# Altium PCB LED Board - Placement v1.0 20210410.PcbDoc
Units mil, origin at the board's own origin, x right, y up, seen from the top; angles counter-clockwise.
Board outline 2362.2 x 2858.27 mil, 2 copper layers (Top Layer, Bottom Layer), stack 65.792 mil thick; 54 components, 96 nets, 276 pads, 119 vias.
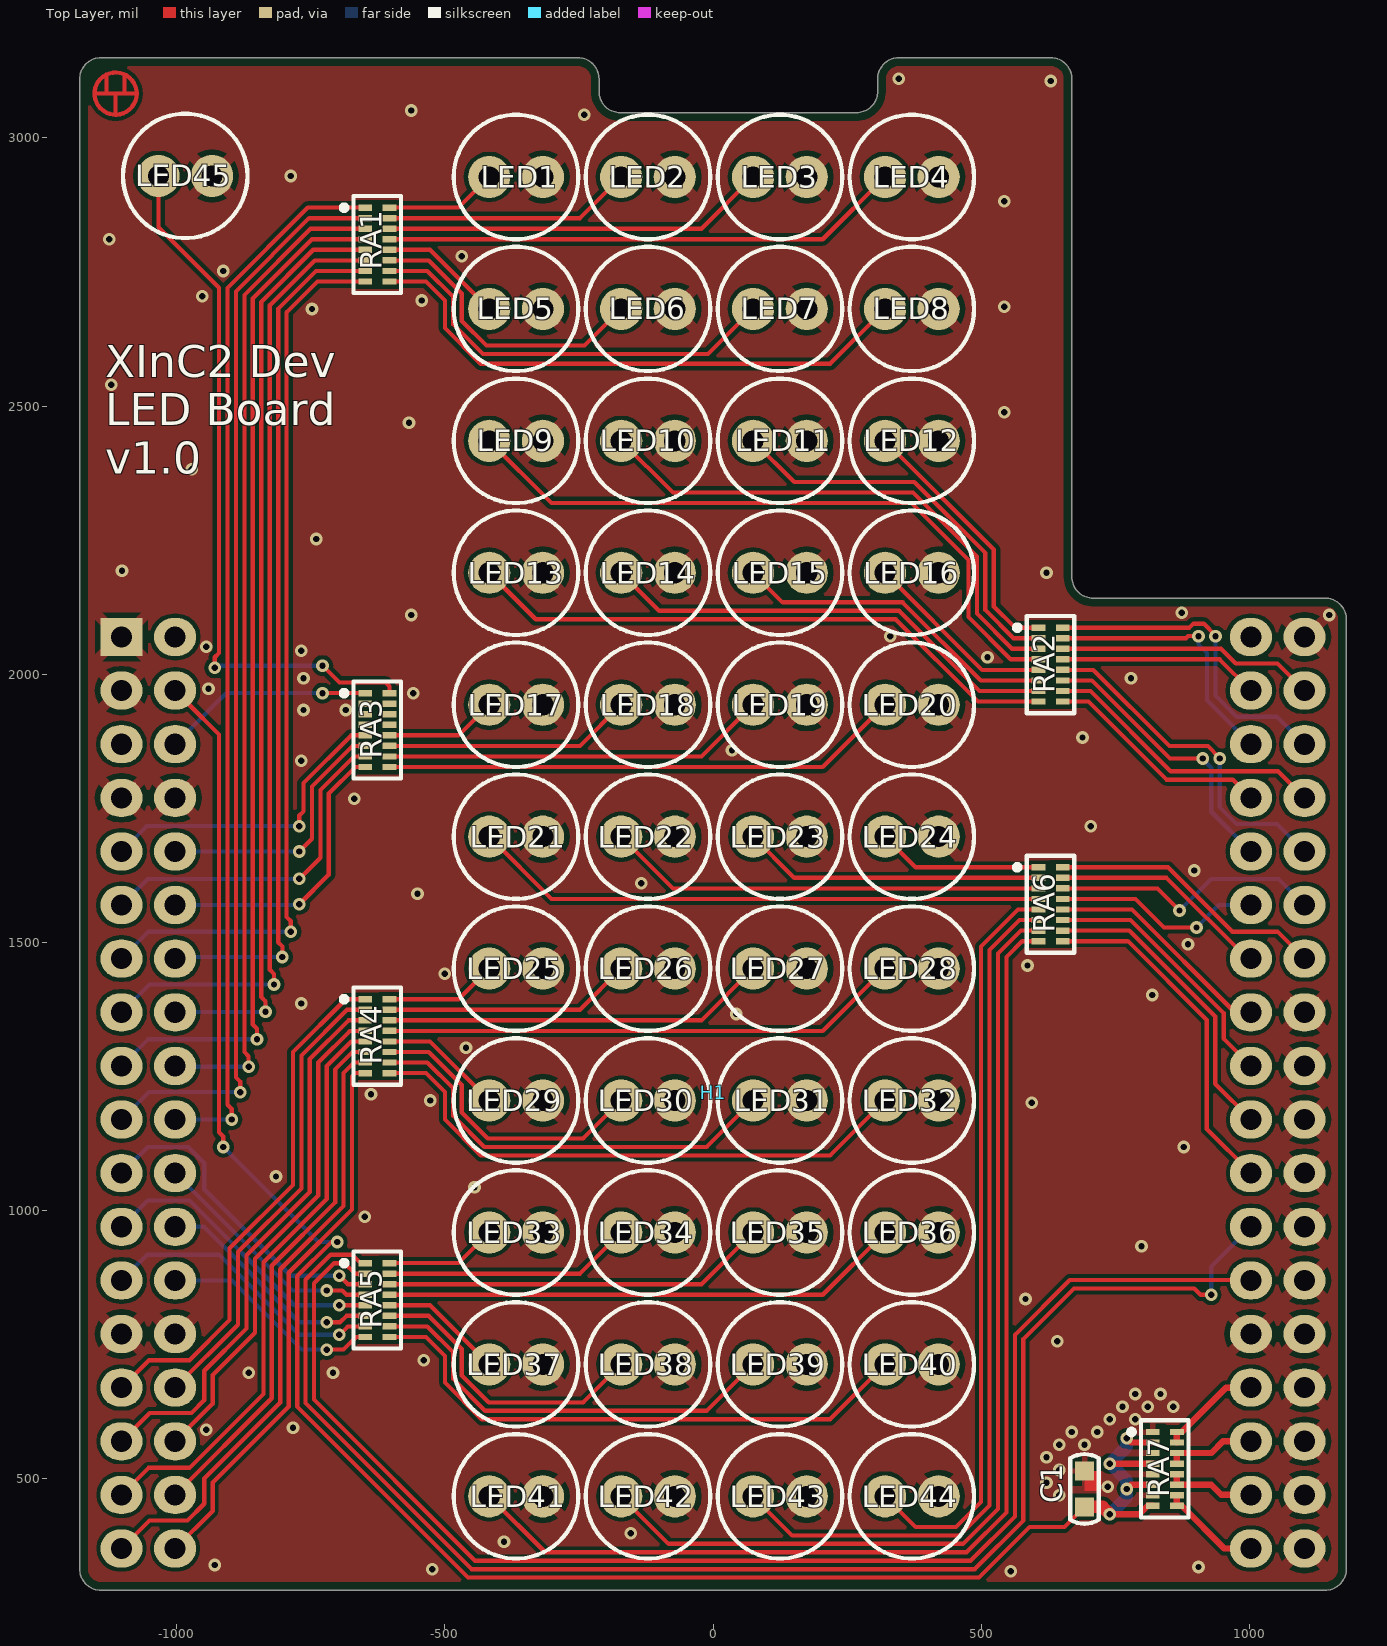
[diagram p0: Top Layer view]
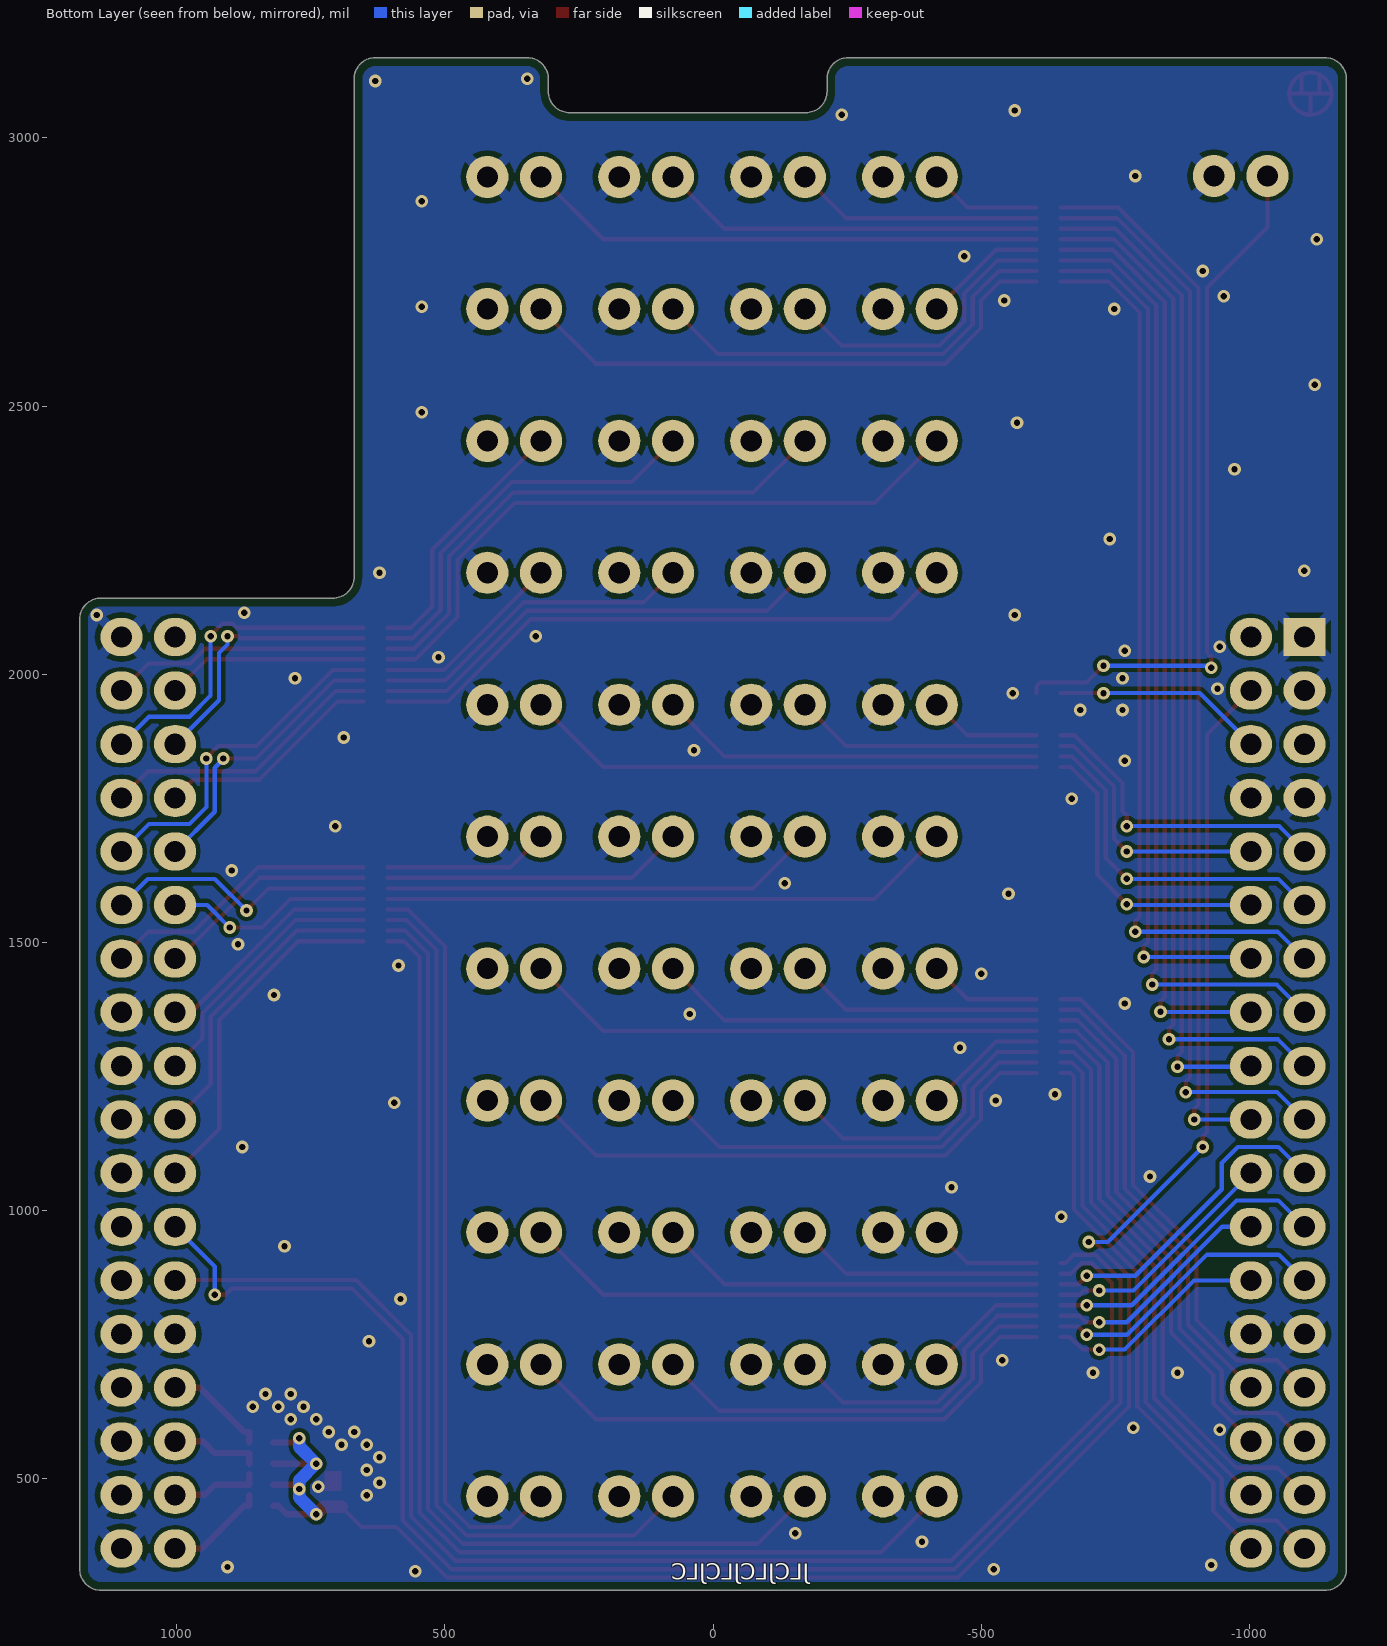
[diagram p1: Bottom Layer view, seen from below]

## Layer stack, top to bottom
Top Solder: solder mask 0.4, Solder Resist, Dk 3.5
Top Layer: signal copper 1.4
Dielectric 1: dielectric 62.9921, FR-4, Dk 4.8
Bottom Layer: signal copper 1.4
Bottom Solder: solder mask 0.4, Solder Resist, Dk 3.5

## Board outline
-1141.73,291.34 cw(c-1141.73,330.71) -1181.1,330.71 -1181.1,3110.24 cw(c-1141.73,3110.24) -1141.73,3149.61 -251.97,3149.61 cw(c-251.97,3110.24) -212.6,3110.24 -212.6,3086.61 ccw(c-173.23,3086.61) -173.23,3047.24 267.72,3047.24 ccw(c267.72,3086.61) 307.09,3086.61 307.09,3110.24 cw(c346.46,3110.24) 346.46,3149.61 629.92,3149.61 cw(c629.92,3110.24) 669.29,3110.24 669.29,2181.1 ccw(c708.66,2181.1) 708.66,2141.73 1141.73,2141.73 cw(c1141.73,2102.36) 1181.1,2102.36 1181.1,330.71 cw(c1141.73,330.71) 1141.73,291.34

## Design rules (kind name [scope] priority, off if disabled: settings)
Clearance [All] p1: gap=7.5 ignorepadtopadclearanceinfootprint=FALSE except(7.87: Arc-Arc Arc-Track Track-Track)
PolygonConnect [All] p1: thpad.connectstyle=Relief thpad.reliefconductorwidth=19.68 thpad.reliefentries=4 thpad.polygonreliefangle="45 Angle" thpad.airgapwidth=10 smdpad.connectstyle=Relief smdpad.reliefconductorwidth=10 smdpad.reliefentries=4 smdpad.polygonreliefangle="90 Angle" smdpad.airgapwidth=10 via.connectstyle=Direct via.reliefconductorwidth=10 via.reliefentries=4 via.polygonreliefangle="90 Angle" via.airgapwidth=10
RoutingVias [All] p1: holewidth=11.81 width=23.62 viastyle="Through Hole" minholewidth=11.81 minwidth=23.62 maxholewidth=28 maxwidth=50
SolderMaskExpansion [All] p1: expansion=4
Width [All] p1: maxlimit=196.85 minlimit=7.87 preferedwidth=7.87 minimp=50.000000 maximp=50.000000 favimp=50.000000
30 further rules are at their usual default settings.

## Components (designator, comment, footprint, x,y, rotation, side; value= is the part's Value field where it differs from the comment)
C1 "100nF" "0603 - C" 692.91,480.32 r90 top value=0.1µF
H1 "XInC2 Dev Headers" "XINC2 DEV SHIELD" 0,0 r0 top locked
LED1 "Red" "LED - RED - TH" -367.32,2927.17 r0 top
LED2 "Red" "LED - RED - TH" -121.26,2927.17 r0 top
LED3 "Red" "LED - RED - TH" 124.8,2927.17 r0 top
LED4 "Red" "LED - RED - TH" 370.87,2927.17 r0 top
LED5 "Red" "LED - RED - TH" -367.32,2681.1 r0 top
LED6 "Red" "LED - RED - TH" -121.26,2681.1 r0 top
LED7 "Red" "LED - RED - TH" 124.8,2681.1 r0 top
LED8 "Red" "LED - RED - TH" 370.87,2681.1 r0 top
LED9 "Red" "LED - RED - TH" -367.32,2435.04 r0 top
LED10 "Red" "LED - RED - TH" -121.26,2435.04 r0 top
LED11 "Red" "LED - RED - TH" 124.8,2435.04 r0 top
LED12 "Red" "LED - RED - TH" 370.87,2435.04 r0 top
LED13 "Red" "LED - RED - TH" -367.32,2188.98 r0 top
LED14 "Red" "LED - RED - TH" -121.26,2188.98 r0 top
LED15 "Red" "LED - RED - TH" 124.8,2188.98 r0 top
LED16 "Red" "LED - RED - TH" 370.87,2188.98 r0 top
LED17 "Red" "LED - RED - TH" -367.32,1942.91 r0 top
LED18 "Red" "LED - RED - TH" -121.26,1942.91 r0 top
LED19 "Red" "LED - RED - TH" 124.8,1942.91 r0 top
LED20 "Red" "LED - RED - TH" 370.87,1942.91 r0 top
LED21 "Red" "LED - RED - TH" -367.32,1696.85 r0 top
LED22 "Red" "LED - RED - TH" -121.26,1696.85 r0 top
LED23 "Red" "LED - RED - TH" 124.8,1696.85 r0 top
LED24 "Red" "LED - RED - TH" 370.87,1696.85 r0 top
LED25 "Red" "LED - RED - TH" -367.32,1450.79 r0 top
LED26 "Red" "LED - RED - TH" -121.26,1450.79 r0 top
LED27 "Red" "LED - RED - TH" 124.8,1450.79 r0 top
LED28 "Red" "LED - RED - TH" 370.87,1450.79 r0 top
LED29 "Red" "LED - RED - TH" -367.32,1204.72 r0 top
LED30 "Red" "LED - RED - TH" -121.26,1204.72 r0 top
LED31 "Red" "LED - RED - TH" 124.8,1204.72 r0 top
LED32 "Red" "LED - RED - TH" 370.87,1204.72 r0 top
LED33 "Red" "LED - RED - TH" -367.32,958.66 r0 top
LED34 "Red" "LED - RED - TH" -121.26,958.66 r0 top
LED35 "Red" "LED - RED - TH" 124.8,958.66 r0 top
LED36 "Red" "LED - RED - TH" 370.87,958.66 r0 top
LED37 "Red" "LED - RED - TH" -367.32,712.6 r0 top
LED38 "Red" "LED - RED - TH" -121.26,712.6 r0 top
LED39 "Red" "LED - RED - TH" 124.8,712.6 r0 top
LED40 "Red" "LED - RED - TH" 370.87,712.6 r0 top
LED41 "Red" "LED - RED - TH" -367.32,466.54 r0 top
LED42 "Red" "LED - RED - TH" -121.26,466.54 r0 top
LED43 "Red" "LED - RED - TH" 124.8,466.54 r0 top
LED44 "Red" "LED - RED - TH" 370.87,466.54 r0 top
LED45 "Red" "LED - RED - TH" -984.25,2929.13 r0 top
RA1 "100Ω" "0616 - 8 R ARRAY" -625.98,2801.18 r0 top value=100O
RA2 "100Ω" "0616 - 8 R ARRAY" 629.53,2017.72 r0 top value=100O
RA3 "100Ω" "0616 - 8 R ARRAY" -625.98,1895.67 r0 top value=100O
RA4 "100Ω" "0616 - 8 R ARRAY" -625.98,1324.8 r0 top value=100O
RA5 "100Ω" "0616 - 8 R ARRAY" -625.98,832.68 r0 top value=100O
RA6 "100Ω" "0616 - 8 R ARRAY" 629.53,1570.87 r0 top value=100O
RA7 "1kΩ" "0616 - 8 R ARRAY" 842.52,517.72 r0 top value=1kO

## Footprints (in the part's own frame and the unit in brackets; to place one, negate y for a bottom-side part, rotate by r counter-clockwise, add the part's x,y. Pads: shape width x height; smd on the part's side, far side on the other; paste and mask are expansions set on the pad)
"0603 - C" [mm] "from Yageo R"
  rect 0.9x0.9 smd mask+0.05: 1(-0.85,0) 2(0.85,0)
  silkscreen extent -1.65,-0.67 1.65,0.67, body extent -0.8,-0.4 0.8,0.4, height 0.85
"0616 - 8 R ARRAY" [mm] "from YC248J-100CT-ND"
  rect 0.65x0.3 smd mask+0.05: 1(-0.575,1.75) 2(-0.575,1.25) 3(-0.575,0.75) 4(-0.575,0.25) 5(-0.575,-0.25) 6(-0.575,-0.75) 7(-0.575,-1.25) 8(-0.575,-1.75) 9(0.575,-1.75) 10(0.575,-1.25) 11(0.575,-0.75) 12(0.575,-0.25) 13(0.575,0.25) 14(0.575,0.75) 15(0.575,1.25) 16(0.575,1.75)
  silkscreen extent -1.7,-2.3 1.12,2.3, body extent -0.8,-2 0.8,2, height 0.45
"LED - RED - TH" [mm] "from 732-5016-ND"
  round 2 hole 1 mask+0.05: 1(-1.27,0) 2(1.27,0)
  silkscreen extent -2.95,-2.95 2.95,2.95, body extent -2.95,-2.95 2.45,2.95, height 9.15
"XINC2 DEV SHIELD" [mm]
  rect 2x1.8 hole 1 mask+0.05: 1(-28.02,52.56)
  oval 2x1.8 hole 1 mask+0.05: 2(-25.48,52.56) 3(-28.02,50.02) 4(-25.48,50.02) 5(-28.02,47.48) 6(-25.48,47.48) 7(-28.02,44.94) 8(-25.48,44.94) 9(-28.02,42.4) 10(-25.48,42.4) 11(-28.02,39.86) 12(-25.48,39.86) 13(-28.02,37.32) 14(-25.48,37.32) 15(-28.02,34.78) 16(-25.48,34.78) 17(-28.02,32.24) 18(-25.48,32.24) 19(-28.02,29.7) 20(-25.48,29.7) 21(-28.02,27.16) 22(-25.48,27.16) 23(-28.02,24.62) 24(-25.48,24.62) 25(-28.02,22.08) 26(-25.48,22.08) 27(-28.02,19.54) 28(-25.48,19.54) 29(-28.02,17) 30(-25.48,17) 31(-28.02,14.46) 32(-25.48,14.46) 33(-28.02,11.92) 34(-25.48,11.92) 35(-28.02,9.38) 36(-25.48,9.38) 37(25.48,52.56) 38(28.02,52.56) 39(25.48,50.02) 40(28.02,50.02) 41(25.48,47.48) 42(28.02,47.48) 43(25.48,44.94) 44(28.02,44.94) 45(25.48,42.4) 46(28.02,42.4) 47(25.48,39.86) 48(28.02,39.86) 49(25.48,37.32) 50(28.02,37.32) 51(25.48,34.78) 52(28.02,34.78) 53(25.48,32.24) 54(28.02,32.24) 55(25.48,29.7) 56(28.02,29.7) 57(25.48,27.16) 58(28.02,27.16) 59(25.48,24.62) 60(28.02,24.62) 61(25.48,22.08) 62(28.02,22.08) 63(25.48,19.54) 64(28.02,19.54) 65(25.48,17) 66(28.02,17) 67(25.48,14.46) 68(28.02,14.46) 69(25.48,11.92) 70(28.02,11.92) 71(25.48,9.38) 72(28.02,9.38)
  body extent -29.23,7.86 29.23,54.08, height 8.31

## Part data
C1: library part "C - 0603 - 100nF - 16V", "CAP CER 0.1UF 16V X7R 0603", Op Temp="-55°C ~ 125°C", Package=0603, Temp Coeff=X7R, Tolerance=±10%, Voltage - Rated=16V, Composition=Ceramic, Digi-Key PN=311-1088-1-ND, Height="0.9 mm", MFG=Yageo, MFG PN=CC0603KRX7R7BB104, Mounting Type="Surface Mount, MLCC", Price/1 @10=$0.064, Series=CC
H1: library part "XInC2 Dev 2 Shield", "Two 2x16 female headers than mate with a XInC2 Dev Board"
LED1 LED2 LED3 LED4 LED5 LED6 LED7 LED8 LED9 LED10 LED11 LED12 LED13 LED14 LED15 LED16 LED17 LED18 LED19 LED20 LED21 LED22 LED23 LED24 LED25 LED26 LED27 LED28 LED29 LED30 LED31 LED32 LED33 LED34 LED35 LED36 LED37 LED38 LED39 LED40 LED41 LED42 LED43 LED44 LED45: library part "LED - TH - Red", "LED RED DIFFUSED 5MM ROUND T/H", Current - Test=20mA, Millicandela Rating=30mcd, Package=Radial, Voltage - Forward (Vf) (Typ)=2.1V, Color=Red, ComponentLink1Description=Datasheet, ComponentLink1URL="E:\!Projects\50. XInC2 Dev 2\git\Datasheets\Wurth - 151051RS11000 - TH LED.pdf", ComponentLink2Description="Online Datasheet", ComponentLink2URL=https://www.we-online.de/katalog/datasheet/151051RS11000.pdf, Digi-Key PN=732-5016-ND, Height=8.95mm, Lens Color=Red, Lens Size="4.90mm Dia", Lens Style="Round with Domed Top", Lens Transparency=Diffused, MFG="Würth Elektronik", MFG PN=151051RS11000, Mounting Type="Through Hole", Price/1 @10=$0.22, Series=WL-TMRC, Viewing Angle=60°, Wavelength - Dominant=645nm, Wavelength - Peak=650nm
RA1 RA2 RA3 RA4 RA5 RA6: library part "RA - 100O - 8", "RES ARRAY 8 RES 100 OHM 1606", Number of Resistors=8, Op Temp="-55°C ~ 155°C", Package="1606, Convex, Long Side Terminals", Power Per Element=62.5mW, Temp Coeff=±200ppm/°C, Tolerance=±5%, Circuit Type=Isolated, ComponentLink1Description=Datasheet, ComponentLink1URL="E:\!Projects\50. XInC2 Dev 2\git\Datasheets\Yageo - YC TC Series.pdf", ComponentLink2Description="Online Datasheet", ComponentLink2URL=https://www.yageo.com/upload/media/product/productsearch/datasheet/rchip/PYu-YC_TC_group_51_RoHS_L_9.pdf, Digi-Key PN=YC248J-100CT-ND, Height=0.55mm, Mounting Type="Surface Mount", Number of Pins=16, Series=YC248
RA7: library part "RA - 1kO - 8", "RES ARRAY 8 RES 1K OHM 1606", Number of Resistors=8, Op Temp="-55°C ~ 155°C", Package="1606, Convex, Long Side Terminals", Power Per Element=62.5mW, Temp Coeff=±200ppm/°C, Tolerance=±5%, Circuit Type=Isolated, ComponentLink1Description=Datasheet, ComponentLink1URL="E:\!Projects\50. XInC2 Dev 2\git\Datasheets\Yageo - YC TC Series.pdf", ComponentLink2Description="Online Datasheet", ComponentLink2URL=https://www.yageo.com/upload/media/product/productsearch/datasheet/rchip/PYu-YC_TC_group_51_RoHS_L_9.pdf, Digi-Key PN=YC248J-1.0KCT-ND, Height=0.55mm, Mounting Type="Surface Mount", Number of Pins=16, Series=YC248

## Via types
v1: diameter 23.62, hole 11.81, Top Layer to Bottom Layer, tented both sides, 119 vias

## Nets (pads, with @x,y where several pads share a name; then routed paths per layer and width w, separated by ;. In a path a pad name is that pad's centre, name@x,y a point inside that pad or via, vN(x,y) a via of type N, cw(c..) or ccw(c..) an arc to the next point about the centre after c; other vN are vias at no path point)
3V3: C1.1 H1.4 RA7.2 RA7.4 RA7.6 RA7.8 | length 3667
  Top Layer w7.87: H1.4@-1003.15,1945.67 -979.53,1945.67 -921.26,1887.4 -921.26,1145.67 -913.39,1137.8 v1(-913.39,1118.11) ; v1(-700.79,940.94) -711.6,940.94 -775.59,876.95 -775.59,633.86 -456.69,314.96 496.06,314.96 590.55,409.45 655.51,409.45 C1.1
  Top Layer w11.81: v1(740.16,433.07) 795.28,433.07 811.02,448.82 RA7.8 ; v1(740.16,527.56) RA7.4 ; v1(771.65,480.32) 779.53,488.19 RA7.6 ; v1(771.65,574.8) 779.53,566.93 RA7.2
  Top Layer w23.62: C1.1 726.38,446.85 v1(740.16,433.07)
  Bottom Layer w7.87: v1(-913.39,1118.11) -736.22,940.94 v1(-700.79,940.94)
  Bottom Layer w23.62: v1(740.16,433.07) 771.65,464.57 v1(771.65,480.32) 771.65,496.06 v1(740.16,527.56) 771.65,559.06 v1(771.65,574.8)
AN0: H1.71 RA7.9 RA7.10 | length 190.6
  Top Layer w11.81: RA7.10 RA7.9 874.02,448.82 953.54,369.29 H1.71
AN1: H1.69 RA7.11 RA7.12 | length 165.5
  Top Layer w11.81: RA7.12 RA7.11 929.13,488.19 948.03,469.29 H1.69
AN2: H1.67 RA7.13 RA7.14 | length 166.8
  Top Layer w11.81: RA7.13 RA7.14 929.13,547.24 951.18,569.29 H1.67
AN3: H1.65 RA7.15 RA7.16 | length 191.9
  Top Layer w11.81: RA7.15 RA7.16 874.02,586.61 956.69,669.29 H1.65
GND: C1.2 H1.1 H1.3 H1.7 H1.8 H1.27 H1.28 H1.38 H1.52 H1.54 H1.56 H1.58 H1.60 H1.62 H1.63 H1.64 H1.66 H1.68 H1.70 H1.72 LED1.2 LED2.2 LED3.2 LED4.2 LED5.2 LED6.2 LED7.2 LED8.2 LED9.2 LED10.2 LED11.2 LED12.2 LED13.2 LED14.2 LED15.2 LED16.2 LED17.2 LED18.2 LED19.2 LED20.2 LED21.2 LED22.2 LED23.2 LED24.2 LED25.2 LED26.2 LED27.2 LED28.2 LED29.2 LED30.2 LED31.2 LED32.2 LED33.2 LED34.2 LED35.2 LED36.2 LED37.2 LED38.2 LED39.2 LED40.2 LED41.2 LED42.2 LED43.2 LED44.2 LED45.2 RA7.1 RA7.3 RA7.5 RA7.7
  other v1: 555.12,326.77 -523.62,330.71 905.51,334.65 -929.13,338.58 -389.76,381.89 -153.54,397.64 645.67,468.5 736.22,484.25 622.05,492.13 645.67,515.75 622.05,539.37 645.67,562.99 692.91,562.99 669.29,586.61 716.54,586.61 -944.88,590.55 -783.46,594.49 740.16,610.24 787.4,610.24 763.78,633.86 811.02,633.86 858.27,633.86 787.4,657.48 834.65,657.48 -866.14,696.85 -708.66,696.85 -539.37,720.47 641.73,755.91 582.68,834.65 799.21,933.07 -649.61,988.19 -444.88,1043.31 -814.96,1062.99 877.95,1118.11 594.49,1200.79 -527.56,1204.72 -637.8,1216.54 -460.63,1303.15 43.31,1366.14 -767.72,1385.83 818.9,1401.57 -500,1440.94 586.61,1456.69 885.83,1496.06 -551.18,1590.55 -133.86,1610.24 897.64,1633.86 704.72,1716.54 -669.29,1767.72 -767.72,1838.58 35.43,1858.27 688.98,1881.89 -763.78,1933.07 -685.04,1933.07 -559.06,1964.57 -940.94,1972.44 -763.78,1992.13 779.53,1992.13 511.81,2031.5 -767.72,2043.31 -944.88,2051.18 330.71,2070.87 -562.99,2110.24 1149.61,2110.24 874.02,2114.17 622.05,2188.98 -1102.36,2192.91 -740.16,2251.97 -972.44,2381.89 -566.93,2468.5 543.31,2488.19 -1122.05,2539.37 -748.03,2681.1 543.31,2685.04 -543.31,2696.85 -952.76,2704.72 -913.39,2751.97 -468.5,2779.53 -1125.98,2811.02 543.31,2881.89 -787.4,2929.13 -240.16,3043.31 -562.99,3051.18 629.92,3106.3 346.46,3110.24
NetLED1_1: LED1.1 RA1.16 | length 209.7
  Top Layer w7.87: RA1.16 -474.41,2870.08 LED1.1
NetLED2_1: LED2.1 RA1.15 | length 463.9
  Top Layer w7.87: RA1.15 -248.03,2850.39 LED2.1
NetLED3_1: LED3.1 RA1.14 | length 718.1
  Top Layer w7.87: RA1.14 -21.65,2830.71 LED3.1
NetLED4_1: LED4.1 RA1.13 | length 972.3
  Top Layer w7.87: RA1.13 204.72,2811.02 LED4.1
NetLED5_1: LED5.1 RA1.12 | length 231.7
  Top Layer w7.87: RA1.12 -527.56,2791.34 LED5.1
NetLED6_1: LED6.1 RA1.11 | length 556.3
  Top Layer w7.87: RA1.11 -530.26,2771.65 -468.5,2709.9 -468.5,2658.72 -422.46,2612.67 -239.69,2612.67 LED6.1
NetLED7_1: LED7.1 RA1.10 | length 807.2
  Top Layer w7.87: RA1.10 -532.85,2751.97 -484.25,2703.37 -484.25,2652.19 -428.99,2596.93 -9.37,2596.93 LED7.1
NetLED8_1: LED8.1 RA1.9 | length 1060.2
  Top Layer w7.87: RA1.9 -535.43,2732.28 -500,2696.85 -500,2645.67 -433.07,2578.74 218.5,2578.74 LED8.1
NetLED9_1: LED9.1 RA2.4 | length 1255.3
  Top Layer w7.87: LED9.1 -301.18,2318.9 370.19,2318.9 476.38,2212.71 476.38,2106.42 555.23,2027.56 RA2.4
NetLED10_1: LED10.1 RA2.3 | length 1001
  Top Layer w7.87: LED10.1 -74.8,2338.58 372.78,2338.58 492.13,2219.24 492.13,2112.94 557.82,2047.24 RA2.3
NetLED11_1: LED11.1 RA2.2 | length 746.8
  Top Layer w7.87: LED11.1 151.57,2358.27 375.37,2358.27 507.87,2225.76 507.87,2119.46 560.41,2066.93 RA2.2
NetLED12_1: LED12.1 RA2.1 | length 492.6
  Top Layer w7.87: LED12.1 523.62,2232.28 523.62,2125.98 562.99,2086.61 RA2.1
NetLED13_1: LED13.1 RA2.8 | length 1123.7
  Top Layer w7.87: LED13.1 -330.71,2102.36 340.67,2102.36 494.21,1948.82 RA2.8
NetLED14_1: LED14.1 RA2.7 | length 869.5
  Top Layer w7.87: LED14.1 -100.39,2118.11 347.19,2118.11 496.8,1968.5 RA2.7
NetLED15_1: LED15.1 RA2.6 | length 615.3
  Top Layer w7.87: LED15.1 129.92,2133.86 353.71,2133.86 499.38,1988.19 RA2.6
NetLED16_1: LED16.1 RA2.5 | length 361
  Top Layer w7.87: LED16.1 501.97,2007.87 RA2.5
NetLED17_1: LED17.1 RA3.12 | length 209.7
  Top Layer w7.87: RA3.12 -474.41,1885.83 LED17.1
NetLED18_1: LED18.1 RA3.11 | length 463.9
  Top Layer w7.87: RA3.11 -248.03,1866.14 LED18.1
NetLED19_1: LED19.1 RA3.10 | length 718.1
  Top Layer w7.87: RA3.10 -21.65,1846.46 LED19.1
NetLED20_1: LED20.1 RA3.9 | length 972.3
  Top Layer w7.87: RA3.9 204.72,1826.77 LED20.1
NetLED21_1: LED21.1 RA6.4 | length 1072.3
  Top Layer w7.87: LED21.1 -301.18,1580.71 RA6.4
NetLED22_1: LED22.1 RA6.3 | length 818.1
  Top Layer w7.87: LED22.1 -74.8,1600.39 RA6.3
NetLED23_1: LED23.1 RA6.2 | length 563.9
  Top Layer w7.87: LED23.1 151.57,1620.08 RA6.2
NetLED24_1: LED24.1 RA6.1 | length 309.7
  Top Layer w7.87: LED24.1 377.95,1639.76 RA6.1
NetLED25_1: LED25.1 RA4.16 | length 209.7
  Top Layer w7.87: RA4.16 -474.41,1393.7 LED25.1
NetLED26_1: LED26.1 RA4.15 | length 463.9
  Top Layer w7.87: RA4.15 -248.03,1374.02 LED26.1
NetLED27_1: LED27.1 RA4.14 | length 718.1
  Top Layer w7.87: RA4.14 -21.65,1354.33 LED27.1
NetLED28_1: LED28.1 RA4.13 | length 972.3
  Top Layer w7.87: RA4.13 204.72,1334.65 LED28.1
NetLED29_1: LED29.1 RA4.12 | length 231.7
  Top Layer w7.87: RA4.12 -527.56,1314.96 LED29.1
NetLED30_1: LED30.1 RA4.11 | length 558.3
  Top Layer w7.87: RA4.11 -530.26,1295.28 -468.5,1233.52 -468.5,1182.34 -420.02,1133.86 -242.13,1133.86 LED30.1
NetLED31_1: LED31.1 RA4.10 | length 809.2
  Top Layer w7.87: RA4.10 -532.85,1275.59 -484.25,1227 -484.25,1175.81 -426.55,1118.11 -11.81,1118.11 LED31.1
NetLED32_1: LED32.1 RA4.9 | length 1060.2
  Top Layer w7.87: RA4.9 -535.43,1255.91 -500,1220.47 -500,1169.29 -433.07,1102.36 218.5,1102.36 LED32.1
NetLED33_1: LED33.1 RA5.16 | length 209.7
  Top Layer w7.87: RA5.16 -474.41,901.57 LED33.1
NetLED34_1: LED34.1 RA5.15 | length 463.9
  Top Layer w7.87: RA5.15 -248.03,881.89 LED34.1
NetLED35_1: LED35.1 RA5.14 | length 718.1
  Top Layer w7.87: RA5.14 -21.65,862.2 LED35.1
NetLED36_1: LED36.1 RA5.13 | length 972.3
  Top Layer w7.87: RA5.13 204.72,842.52 LED36.1
NetLED37_1: LED37.1 RA5.12 | length 231.7
  Top Layer w7.87: RA5.12 -527.56,822.83 LED37.1
NetLED38_1: LED38.1 RA5.11 | length 557.3
  Top Layer w7.87: RA5.11 -530.26,803.15 -468.5,741.39 -468.5,691.93 -418.31,641.73 -242.13,641.73 LED38.1
NetLED39_1: LED39.1 RA5.10 | length 808.2
  Top Layer w7.87: RA5.10 -532.85,783.46 -484.25,734.87 -484.25,685.4 -424.83,625.98 -11.81,625.98 LED39.1
NetLED40_1: LED40.1 RA5.9 | length 1059.2
  Top Layer w7.87: RA5.9 -535.43,763.78 -500,728.35 -500,678.88 -431.35,610.24 218.5,610.24 LED40.1
NetLED41_1: LED41.1 RA6.8 | length 2146.4
  Top Layer w7.87: LED41.1 -312.99,362.2 472.97,362.2 547.24,436.48 547.24,1472.44 576.77,1501.97 RA6.8
NetLED42_1: LED42.1 RA6.7 | length 1895.4
  Top Layer w7.87: LED42.1 -82.68,377.95 466.45,377.95 531.5,443 531.5,1478.96 574.19,1521.65 RA6.7
NetLED43_1: LED43.1 RA6.6 | length 1644.5
  Top Layer w7.87: LED43.1 147.64,393.7 459.92,393.7 515.75,449.53 515.75,1485.49 571.6,1541.34 RA6.6
NetLED44_1: LED44.1 RA6.5 | length 1393.5
  Top Layer w7.87: LED44.1 377.95,409.45 453.4,409.45 500,456.05 500,1492.01 569.01,1561.02 RA6.5
NetLED45_1: LED45.1 RA3.16 | length 1323.5
  Top Layer w7.87: LED45.1 -1034.25,2833.46 -921.26,2720.47 -921.26,2039.37 -929.13,2031.5 v1(-929.13,2011.81) ; v1(-728.35,2015.75) -696.85,1984.25 -610.24,1984.25 -603.35,1977.36 RA3.16
  Bottom Layer w7.87: v1(-929.13,2011.81) -925.2,2015.75 v1(-728.35,2015.75)
PA0: H1.20 RA1.1 | length 1978.7
  Top Layer w7.87: v1(-897.64,1169.29) -897.64,1188.98 -905.51,1196.85 -905.51,2720.36 -755.79,2870.08 RA1.1
  Bottom Layer w7.87: H1.20 v1(-897.64,1169.29)
PA1: H1.19 RA1.2 | length 2036.8
  Top Layer w7.87: v1(-881.89,1220.47) -881.89,1240.16 -889.76,1248.03 -889.76,2713.83 -753.2,2850.39 RA1.2
  Bottom Layer w7.87: H1.19 -1051.97,1220.47 v1(-881.89,1220.47)
PA2: H1.18 RA1.3 | length 1857
  Top Layer w7.87: v1(-866.14,1267.72) -866.14,1287.4 -874.02,1295.28 -874.02,2707.31 -750.62,2830.71 RA1.3
  Bottom Layer w7.87: H1.18@-1003.15,1245.67 H1.18@-1001.57,1244.09 ; H1.18@-1001.57,1267.72 v1(-866.14,1267.72)
PA3: H1.17 RA1.4 | length 1913.8
  Top Layer w7.87: v1(-850.39,1318.9) -850.39,1338.58 -858.27,1346.46 -858.27,2700.79 -748.03,2811.02 RA1.4
  Bottom Layer w7.87: H1.17 -1053.54,1318.9 v1(-850.39,1318.9)
PA4: H1.16 RA1.5 | length 1730.4
  Top Layer w7.87: v1(-834.65,1370.08) -834.65,1389.76 -842.52,1397.64 -842.52,2694.26 -745.45,2791.34 RA1.5
  Bottom Layer w7.87: H1.16@-1003.15,1345.67 H1.16@-1002.36,1346.46 ; H1.16@-1002.36,1370.08 v1(-834.65,1370.08)
PA5: H1.15 RA1.6 | length 1788.4
  Top Layer w7.87: v1(-818.9,1421.26) -818.9,1440.94 -826.77,1448.82 -826.77,2687.74 -742.86,2771.65 RA1.6
  Bottom Layer w7.87: H1.15 -1051.18,1421.26 v1(-818.9,1421.26)
PA6: H1.14 RA1.7 | length 1605.1
  Top Layer w7.87: v1(-803.15,1472.44) -803.15,1492.13 -811.02,1500 -811.02,2681.22 -740.27,2751.97 RA1.7
  Bottom Layer w7.87: H1.14@-1003.15,1445.67 H1.14@-1000,1448.82 ; H1.14@-1000,1472.44 v1(-803.15,1472.44)
PA7: H1.13 RA1.8 | length 1665.4
  Top Layer w7.87: v1(-787.4,1519.69) -787.4,1539.37 -795.28,1547.24 -795.28,2674.69 -737.69,2732.28 RA1.8
  Bottom Layer w7.87: H1.13 -1052.76,1519.69 v1(-787.4,1519.69)
PC0: H1.39 RA2.13 | length 377.9
  Top Layer w7.87: RA2.13 944.88,2027.56 H1.39 ; H1.39@1000.39,1945.67 H1.39@1003.15,1945.67
PC1: H1.40 RA2.14 | length 483.3
  Top Layer w7.87: RA2.14 947.47,2047.24 975.03,2019.69 1052.76,2019.69 H1.40
PC2: H1.41 RA2.15 | length 497
  Top Layer w7.87: RA2.15 881.89,2066.93 885.83,2070.87 v1(905.51,2070.87)
  Bottom Layer w7.87: v1(905.51,2070.87) 905.51,2055.12 921.26,2039.37 921.26,1951.18 H1.41
PC3: H1.42 RA2.16 | length 613.1
  Top Layer w7.87: RA2.16 888.38,2086.61 895.88,2094.11 915.14,2094.11 937.01,2072.25 v1(937.01,2070.87)
  Bottom Layer w7.87: v1(937.01,2070.87) 937.01,1959.84 976.38,1920.47 1051.97,1920.47 H1.42
PC4: H1.43 RA2.9 | length 425.3
  Top Layer w7.87: RA2.9 700.29,1948.82 845.96,1803.15 969.29,1803.15 H1.43
PC5: H1.44 RA2.10 | length 533.5
  Top Layer w7.87: RA2.10 703.94,1968.5 853.54,1818.9 1053.54,1818.9 H1.44
PC6: H1.45 RA2.11 | length 532
  Top Layer w7.87: RA2.11 706.52,1988.19 852.19,1842.52 v1(913.39,1842.52)
  Bottom Layer w7.87: v1(913.39,1842.52) 913.39,1841.14 929.13,1825.39 929.13,1743.31 H1.45
PC7: H1.46 RA2.12 | length 645.1
  Top Layer w7.87: RA2.12 709.11,2007.87 851.22,1865.77 923.02,1865.77 944.88,1843.9 v1(944.88,1842.52)
  Bottom Layer w7.87: v1(944.88,1842.52) 944.88,1751.97 976.38,1720.47 1051.97,1720.47 H1.46
PD0: H1.9 RA3.5 | length 586.6
  Top Layer w7.87: v1(-771.65,1716.54) -771.65,1736.22 -763.78,1744.09 -763.78,1796.74 -674.7,1885.83 RA3.5
  Bottom Layer w7.87: H1.9 -1055.91,1716.54 v1(-771.65,1716.54)
PD1: H1.10 RA3.6 | length 493.1
  Top Layer w7.87: v1(-771.65,1669.29) -748.03,1692.91 -748.03,1790.22 -672.11,1866.14 RA3.6
  Bottom Layer w7.87: H1.10 v1(-771.65,1669.29)
PD2: H1.11 RA3.7 | length 643.3
  Top Layer w7.87: v1(-771.65,1618.11) -732.28,1657.48 -732.28,1783.7 -669.52,1846.46 RA3.7
  Bottom Layer w7.87: H1.11 -1054.33,1618.11 v1(-771.65,1618.11)
PD3: H1.12 RA3.8 | length 551.1
  Top Layer w7.87: H1.12@-1003.15,1545.67 H1.12@-999.52,1545.67 ; v1(-771.65,1570.87) -716.54,1625.98 -716.54,1777.17 -666.94,1826.77 RA3.8
  Bottom Layer w7.87: H1.12 v1@-773.23,1569.29
PD4: H1.47 RA6.13 | length 390.3
  Top Layer w7.87: RA6.13 787.99,1580.71 841.14,1527.56 v1(901.57,1527.56)
  Bottom Layer w7.87: v1(901.57,1527.56) 943.31,1569.29 H1.47
PD5: H1.48 RA6.14 | length 512.8
  Top Layer w7.87: RA6.14 828.74,1600.39 v1(870.08,1559.06)
  Bottom Layer w7.87: v1(870.08,1559.06) 929.13,1618.11 1054.33,1618.11 H1.48
PD6: H1.49 RA6.15 | length 413.4
  Top Layer w7.87: RA6.15 845.84,1620.08 H1.49@996.63,1469.29 ; H1.49@996.63,1445.67 H1.49@1003.15,1445.67
PD7: H1.50 RA6.16 | length 521.6
  Top Layer w7.87: RA6.16 848.42,1639.76 968.5,1519.69 1052.76,1519.69 H1.50
PE0: H1.29 RA4.1 | length 978.3
  Top Layer w7.87: H1.29 -1051.97,720.47 -976.38,720.47 -901.57,795.28 -901.57,929.13 -783.46,1047.24 -783.46,1295.28 -685.04,1393.7 RA4.1
PE1: H1.30 RA4.2 | length 871.4
  Top Layer w7.87: H1.30 -885.83,786.61 -885.83,922.61 -767.72,1040.72 -767.72,1288.75 -682.45,1374.02 RA4.2
PE2: H1.31 RA4.3 | length 1037.1
  Top Layer w7.87: H1.31 -1050.39,622.05 -972.66,622.05 -948.82,645.89 -948.82,700.79 -870.08,779.53 -870.08,916.09 -751.97,1034.2 -751.97,1282.23 -679.87,1354.33 RA4.3
PE3: H1.32 RA4.4 | length 929
  Top Layer w7.87: H1.32 -933.07,639.37 -933.07,692.91 -854.33,771.65 -854.33,909.56 -736.22,1027.68 -736.22,1275.71 -677.28,1334.65 RA4.4
PE4: H1.33 RA4.5 | length 1094
  Top Layer w7.87: H1.33 -1052.76,519.69 -976.38,519.69 -838.58,657.48 -838.58,903.04 -720.47,1021.15 -720.47,1269.18 -674.7,1314.96 RA4.5
PE5: H1.34 RA4.6 | length 986.6
  Top Layer w7.87: H1.34 -822.83,649.61 -822.83,896.52 -704.72,1014.63 -704.72,1262.66 -672.11,1295.28 RA4.6
PE6: H1.35 RA4.7 | length 1148.3
  Top Layer w7.87: H1.35 -1051.18,421.26 -980.31,421.26 -948.82,452.76 -948.82,500 -807.09,641.73 -807.09,890 -688.98,1008.11 -688.98,1256.14 -669.52,1275.59 RA4.7
PE7: H1.36 RA4.8 | length 1044.2
  Top Layer w7.87: H1.36 -933.07,439.37 -933.07,492.13 -791.34,633.86 -791.34,883.47 -673.23,1001.58 -673.23,1249.61 -666.94,1255.91 RA4.8
PF0: H1.59 RA5.1 | length 2762
  Top Layer w7.87: RA5.1 -657.48,901.57 -673.23,917.32 -712.95,917.32 -759.84,870.43 -759.84,640.38 -450.17,330.71 488.19,330.71 578.74,421.26 578.74,759.84 673.23,854.33 897.64,854.33 909.45,842.52 v1(929.13,842.52)
  Bottom Layer w7.87: v1(929.13,842.52) 929.13,895.28 H1.59
PF1: H1.61 RA5.2 | length 2623.2
  Top Layer w7.87: RA5.2 -667.91,881.89 -687.22,901.2 -706.8,901.2 -744.09,863.9 -744.09,646.9 -443.65,346.46 480.31,346.46 562.99,429.13 562.99,767.72 665.35,870.08 H1.61@1002.36,870.08 ; H1.61@1002.36,846.46 H1.61@1003.15,845.67
PH0: H1.21 RA5.3 | length 609.3
  Top Layer w7.87: v1(-696.85,877.95) -681.07,862.2 RA5.3
  Bottom Layer w7.87: H1.21 -1054.33,1118.11 -978.74,1118.11 -948.82,1088.19 -948.82,1039.37 -787.4,877.95 v1(-696.85,877.95)
PH1: H1.22 RA5.4 | length 448.5
  Top Layer w7.87: v1(-720.47,850.39) -691.53,850.39 -683.66,842.52 RA5.4
  Bottom Layer w7.87: H1.22 -784.25,850.39 v1(-720.47,850.39)
PH2: H1.23 RA5.5 | length 555.6
  Top Layer w7.87: v1(-696.85,822.83) RA5.5
  Bottom Layer w7.87: H1.23 -1054.33,1018.11 -976.15,1018.11 -780.88,822.83 v1(-696.85,822.83)
PI0: H1.24 RA5.6 | length 433.1
  Top Layer w7.87: v1(-720.47,791.34) -695.47,791.34 -683.66,803.15 RA5.6
  Bottom Layer w7.87: H1.24 -949.61,969.29 -771.65,791.34 v1(-720.47,791.34)
PI1: H1.25 RA5.7 | length 542.9
  Top Layer w7.87: v1(-696.85,767.72) -681.07,783.46 RA5.7
  Bottom Layer w7.87: H1.25 -1055.12,917.32 -921.26,917.32 -771.65,767.72 v1(-696.85,767.72)
PI2: H1.26 RA5.8 | length 417.8
  Top Layer w7.87: v1(-720.47,740.16) -688.98,740.16 -665.35,763.78 RA5.8
  Bottom Layer w7.87: H1.26 -896.85,869.29 -767.72,740.16 v1(-720.47,740.16)
PJ0: H1.57 RA6.9 | length 649.2
  Top Layer w7.87: RA6.9 773.62,1501.97 920.85,1354.74 920.85,1151.59 H1.57
PJ1: H1.55 RA6.10 | length 570.4
  Top Layer w7.87: RA6.10 776.21,1521.65 936.59,1361.27 936.59,1235.85 H1.55
PJ2: H1.53 RA6.11 | length 491.6
  Top Layer w7.87: RA6.11 778.79,1541.34 952.34,1367.79 952.34,1320.1 H1.53
PJ3: H1.51 RA6.12 | length 430.4
  Top Layer w7.87: RA6.12 781.38,1561.02 973.11,1369.29 H1.51
TMRB: H1.6 RA3.1 | length 417.6
  Top Layer w7.87: v1(-728.35,1964.57) RA3.1
  Bottom Layer w7.87: H1.6@-1003.15,1845.67 H1.6 -907.87,1964.57 v1(-728.35,1964.57)
pads on no net: H1.2 H1.5 H1.37 RA3.2 RA3.3 RA3.4 RA3.13 RA3.14 RA3.15
copper on no net: | length 434.8
  Top Layer w7.87: -1153.54,3082.68 -1074.8,3082.68 ; -1130.91,3082.68 -1130.91,3116.14 ; -1114.17,3043.31 -1114.17,3082.68 ; -1097.44,3083.66 -1097.44,3116.14 ; 1000.79,2043.31 1003.15,2045.67 ; -1074.8,3082.68 ccw(c-1114.17,3082.68) -1074.8,3082.68

## Polygon pours and split planes (outlines as drawn)
GND on Top Layer "Top Layer-GND" (solid, pour order 6): -1141.73,307.09 cw(c-1141.73,330.71) -1165.35,330.71 -1165.35,3110.24 cw(c-1141.73,3110.24) -1141.73,3133.86 -251.97,3133.86 cw(c-251.97,3110.24) -228.35,3110.24 -228.35,3086.61 ccw(c-173.23,3086.61) -173.23,3031.5 267.72,3031.5 ccw(c267.72,3086.61) 322.83,3086.61 322.83,3110.24 cw(c346.46,3110.24) 346.46,3133.86 629.92,3133.86 cw(c629.92,3110.24) 653.54,3110.24 653.54,2181.1 ccw(c708.66,2181.1) 708.66,2125.98 1141.73,2125.98 cw(c1141.73,2102.36) 1165.35,2102.36 1165.35,330.71 cw(c1141.73,330.71) 1141.73,307.09
GND on Bottom Layer "Bottom Layer-GND" (solid, pour order 8): -1141.73,307.09 cw(c-1141.73,330.71) -1165.35,330.71 -1165.35,3110.24 cw(c-1141.73,3110.24) -1141.73,3133.86 -251.97,3133.86 cw(c-251.97,3110.24) -228.35,3110.24 -228.35,3086.61 ccw(c-173.23,3086.61) -173.23,3031.5 267.72,3031.5 ccw(c267.72,3086.61) 322.83,3086.61 322.83,3110.24 cw(c346.46,3110.24) 346.46,3133.86 629.92,3133.86 cw(c629.92,3110.24) 653.54,3110.24 653.54,2181.1 ccw(c708.66,2181.1) 708.66,2125.98 1141.73,2125.98 cw(c1141.73,2102.36) 1165.35,2102.36 1165.35,330.71 cw(c1141.73,330.71) 1141.73,307.09

## Other copper
Top Layer:
  rectangle net GND: 692.91,476.38 724.41,513.78

## Silkscreen, mask and mechanical layers (free items; w line width, h text height)
Top Overlay:
  text "XInC2 Dev / LED Board / v1.0" at -1133.86,2374.02 h60
Bottom Overlay:
  text "JLCJLCJLCJLC" at -179.94,311.02 h30
Board Outline (M1):
  the board outline again, w7.87
Ground Plane (M2):
  lines w7.87: -228.35,3110.24 ccw(c-251.97,3110.24) -251.97,3133.86 -1141.73,3133.86 ccw(c-1141.73,3110.24) -1165.35,3110.24 -1165.35,330.71 ccw(c-1141.73,330.71) -1141.73,307.09 1141.73,307.09 ccw(c1141.73,330.71) 1165.35,330.71 1165.35,2102.36 ccw(c1141.73,2102.36) 1141.73,2125.98 708.66,2125.98 cw(c708.66,2181.1) 653.54,2181.1 653.54,3110.24 ccw(c629.92,3110.24) 629.92,3133.86 346.46,3133.86 ccw(c346.46,3110.24) 322.83,3110.24 ; -228.35,3110.24 -228.35,3086.61 ccw(c-173.23,3086.61) -173.23,3031.5 267.72,3031.5 ccw(c267.72,3086.61) 322.83,3086.61 322.83,3110.24 ; -228.35,3110.24 -228.35,3110.24 ; 322.83,3110.24 322.83,3110.24
Scratch (M3):
  lines w7.87: -114.17,3043.31 -114.17,3066.93

## Dimensions
-1181.1,3110.24 to 1181.1,2102.36 on Scratch (M3)
-1141.73,3149.61 to -1141.73,291.34 on Scratch (M3)